# Altium PCB EECS430PhasedArray.PcbDoc (part 1 of 2)
Units mil, origin at the board's own origin, x right, y up, seen from the top; angles counter-clockwise.
Board outline 6900 x 8200 mil, 2 copper layers (Top Layer, Bottom Layer), stack 62.8 mil thick; 97 components, 54 nets, 335 pads, 174 vias.
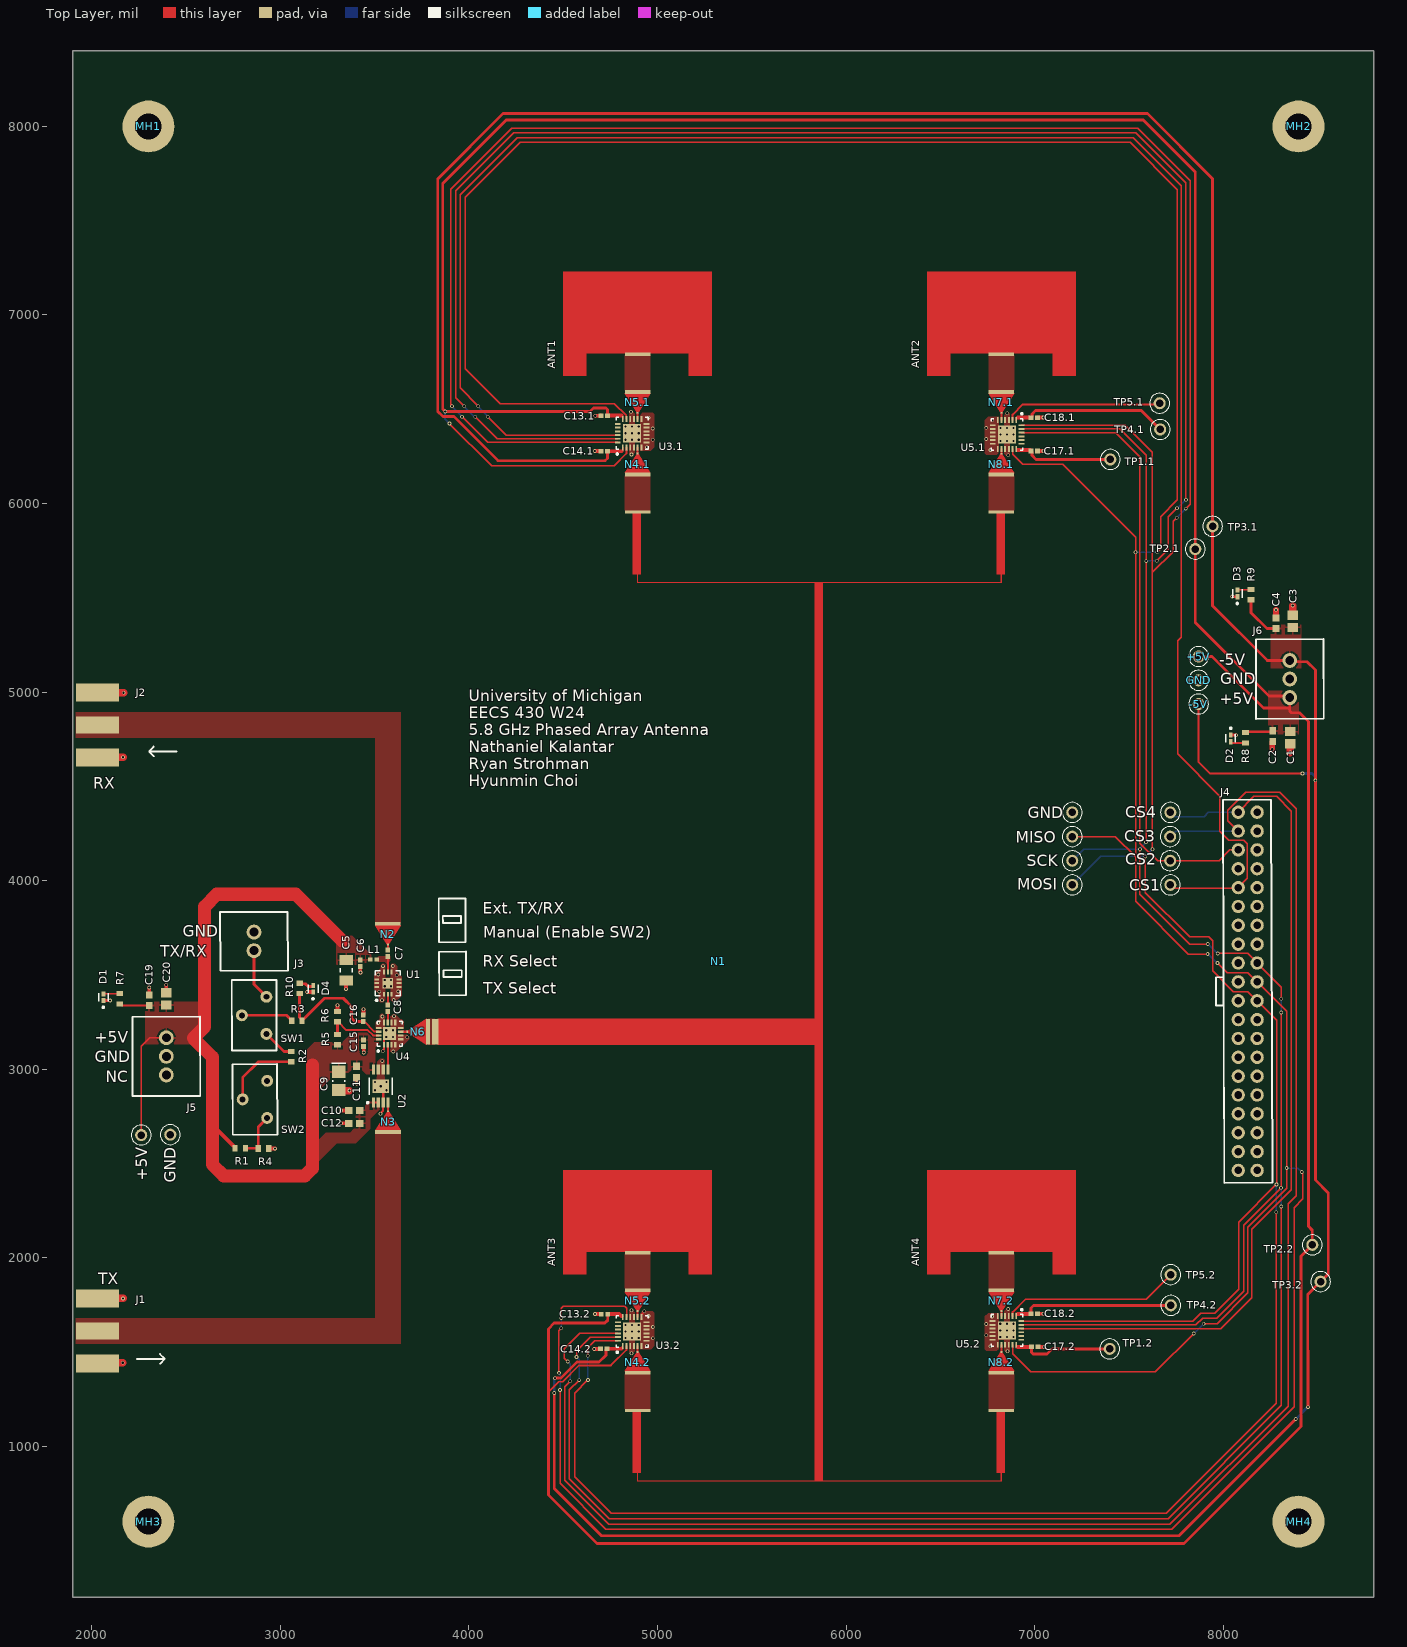
[diagram p0: Top Layer view]
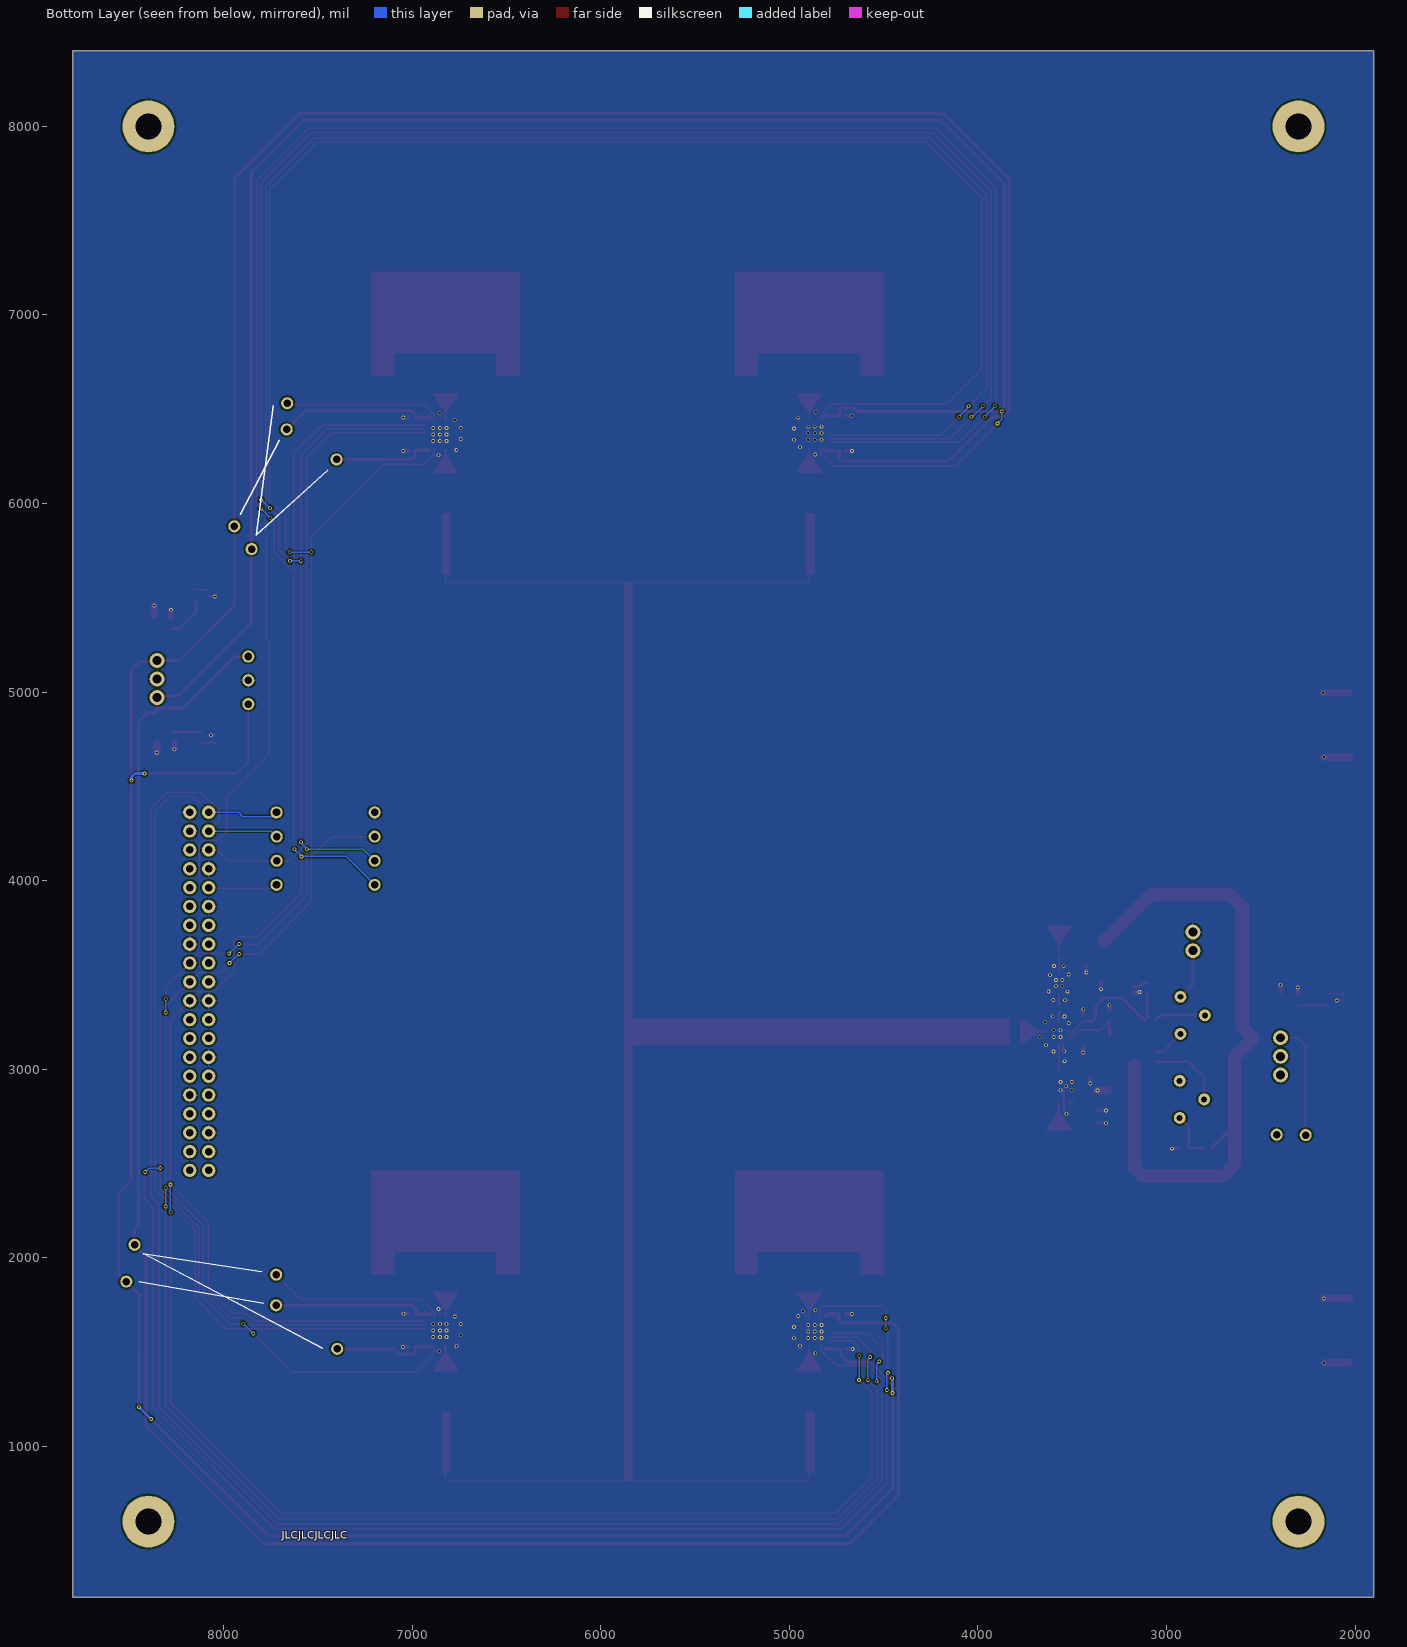
[diagram p1: Bottom Layer view, seen from below]
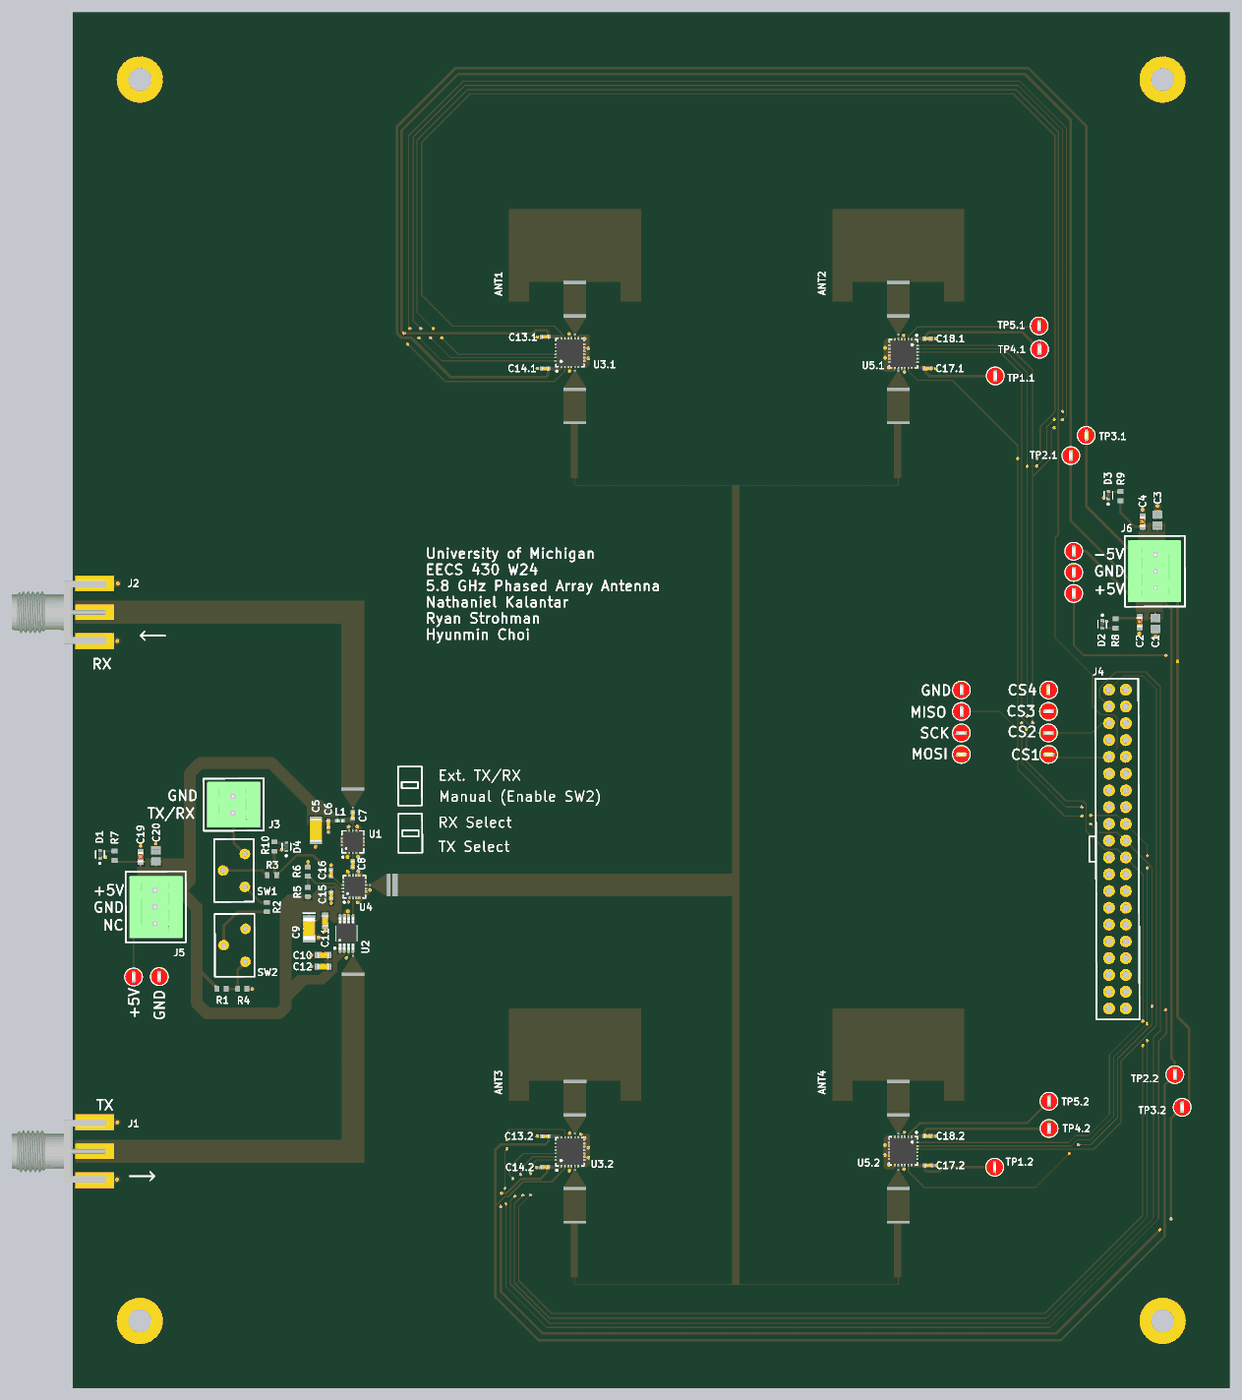
[diagram p3: 3D render of the assembled board from above, using the file's embedded part models]

## Layer stack, top to bottom
Top Solder: solder mask 0.4, Solder Resist, Dk 3.5
Top Layer: signal copper 1.4
Dielectric 1: dielectric 60, FR-4, Dk 4.8
Bottom Layer: signal copper 1.4
Bottom Solder: solder mask 0.4, Solder Resist, Dk 3.5

## Board outline
1900,200 8800,200 8800,8400 1900,8400

## Design rules (kind name [scope] priority, off if disabled: settings)
Clearance [All] p1: gap=10 ignorepadtopadclearanceinfootprint=FALSE except(0: Arc-Hole SMDPad-Hole THPad-Hole Via-Hole Fill-Hole Poly-Hole Region-Hole Text-Hole; 5: Track-Track Track-Poly SMDPad-SMDPad; 7.87: Track-SMDPad Track-THPad; 19.68: THPad-THPad)
HoleSize [All] p1: absolutevalues=TRUE maxlimit=248.03 minlimit=11.81 maxpercent=80.000 minpercent=20.000
MinimumAnnularRing MinimumAnnularRingVia [IsVia] p1: minimumring=3.94
MinimumAnnularRing [All] p2: minimumring=9.84
MinimumSolderMaskSliver [All] p1: minsoldermaskwidth=3.94
PolygonConnect PolygonConnectGNDVia [InNet('GND') And IsPolygon vs InNet('GND') And (IsVia Or IsPad)] p1: thpad.connectstyle=Relief thpad.reliefconductorwidth=10 thpad.reliefentries=4 thpad.polygonreliefangle="90 Angle" thpad.airgapwidth=10 smdpad.connectstyle=Direct smdpad.reliefconductorwidth=10 smdpad.reliefentries=4 smdpad.polygonreliefangle="90 Angle" smdpad.airgapwidth=10 via.connectstyle=Direct via.reliefconductorwidth=10 via.reliefentries=4 via.polygonreliefangle="90 Angle" via.airgapwidth=5
PolygonConnect PolygonConnectPadsDirect [INNet('NetC7_1')] p2: thpad.connectstyle=Relief thpad.reliefconductorwidth=10 thpad.reliefentries=4 thpad.polygonreliefangle="90 Angle" thpad.airgapwidth=10 smdpad.connectstyle=Direct smdpad.reliefconductorwidth=10 smdpad.reliefentries=4 smdpad.polygonreliefangle="90 Angle" smdpad.airgapwidth=10 via.connectstyle=Relief via.reliefconductorwidth=10 via.reliefentries=4 via.polygonreliefangle="90 Angle" via.airgapwidth=10
PolygonConnect PolygonConnectPWR [InNet('5VP') Or InNet('5VN')] p3: thpad.connectstyle=Relief thpad.reliefconductorwidth=10 thpad.reliefentries=4 thpad.polygonreliefangle="90 Angle" thpad.airgapwidth=10 smdpad.connectstyle=Relief smdpad.reliefconductorwidth=10 smdpad.reliefentries=4 smdpad.polygonreliefangle="90 Angle" smdpad.airgapwidth=5 via.connectstyle=Relief via.reliefconductorwidth=10 via.reliefentries=4 via.polygonreliefangle="90 Angle" via.airgapwidth=10
PolygonConnect PolygonConnectNetTie [HasFootprint('50OhmTaper') Or HasFootprint('50OhmMicrostrip5.5mm') Or HasFootprint('ArrayFeed') Or HasFootprint('ArrayPatch') Or HasFootprint('0732511153')] p4: connectstyle=Direct reliefconductorwidth=10 reliefentries=4 polygonreliefangle="90 Angle" airgapwidth=10
PolygonConnect [All] p5: connectstyle=Relief reliefconductorwidth=10 reliefentries=4 polygonreliefangle="90 Angle" airgapwidth=10
RoutingVias [All] p1: holewidth=11.81 width=19.68 viastyle="Through Hole" minholewidth=11.81 minwidth=19.68 maxholewidth=157.48 maxwidth=196.85
SilkToSolderMaskClearance [IsPad] p1: minsilkscreentomaskgap=5 clearancetoexposedcopper=TRUE
SolderMaskExpansion [All] p1: expansion=1.5 istentingtop=FALSE
Width [All] p1: maxlimit=196.85 minlimit=5 preferedwidth=10
27 further rules are at their usual default settings.

## Classes and differential pairs
channel class PhaseShifterB: Phaseshift12 Phaseshift22
channel class PhaseShifterA: Phaseshift11 Phaseshift21
component class "TX/RX Switch": C15 C16 N6 R5 R6 U4
component class Phaseshift22: C17.2 C18.2 N7.2 N8.2 TP1.2 TP2.2 TP3.2 TP4.2 TP5.2 U5.2
component class Phaseshift21: C13.2 C14.2 N4.2 N5.2 U3.2
component class Phaseshift12: C17.1 C18.1 N7.1 N8.1 TP1.1 TP2.1 TP3.1 TP4.1 TP5.1 U5.1
component class Phaseshift11: C13.1 C14.1 N4.1 N5.1 U3.1
component class PA: C9 C10 C11 C12 N3 U2
component class LNA: C5 C6 C7 C8 L1 N2 U1
component class EECS430PhasedArray: ANT1 ANT2 ANT3 ANT4 C1 C2 C3 C4 C19 C20 D1 D2 D3 D4 J1 J2 J3 J4 J5 J6 MH1 MH2 MH3 MH4 N1 R1 R2 R3 R4 R7 R8 R9 R10 SW1 SW2 TP6 TP7 TP8 TP9 TP10 TP11 TP12 TP13 TP14 TP15 TP16 TP17 TP18

## Components (designator, comment, footprint, x,y, rotation, side; value= is the part's Value field where it differs from the comment)
+5V "5000" FP-5000-MFG 2262.08,2650.31 r90 top (schematic designator TP15)
+5V "5000" FP-5000-MFG 7870.08,5188.31 r90 top (schematic designator TP14)
-5V "5000" FP-5000-MFG 7870.08,4936.31 r90 top (schematic designator TP16)
ANT1 "ArrayPatch" ArrayPatch 4894.84,6780.98 r90 top
ANT2 "ArrayPatch" ArrayPatch 6823.98,6780.98 r90 top
ANT3 "ArrayPatch" ArrayPatch 4894.92,2016.69 r90 top
ANT4 "ArrayPatch" ArrayPatch 6824.06,2016.69 r90 top
C1 "Ceramic Capacitor 0805" FP-0805-Capacitor-CL21-IPC_B 8356.65,4757.88 r270 top value=1uF
C2 "Ceramic Capacitor 0603" FP-0603-Capacitor-CL10-IPC_B 8263.15,4765.79 r270 top value=100nF
C3 "Ceramic Capacitor 0805" FP-0805-Capacitor-CL21-IPC_B 8369.33,5374.57 r90 top value=1uF
C4 "Ceramic Capacitor 0603" FP-0603-Capacitor-CL10-IPC_B 8280.23,5364.65 r90 top value=100nF
C5 "CL31A106KBHNNNE" Capactor1206_Samsung 3350.08,3524.31 r270 top value=10uF
C6 "GRM1555C1H101JA01" Capacitor0402_Murata 3424.08,3562.31 r270 top value=100pF
C7 "GRM1555C1H220JA01" Capacitor0402_Murata 3570.08,3614.63 r90 top value=22pF
C8 "GRM1555C1H220JA01" Capacitor0402_Murata 3570.08,3323.31 r90 top value=22pF
C9 "TAJA225K016TNJ" TantCapKyocera1206 3309.2,2937.34 r270 top value=2.2uF
C10 "GRM188R72E331KW07D" Murata0603CeramicCap 3392.08,2780.31 r180 top value=330pF
C11 "GRM188R72E331KW07D" Murata0603CeramicCap 3404.67,2984.58 r270 top value=330pF
C12 "GRM188R72E331KW07D" Murata0603CeramicCap 3392.08,2712.31 r180 top value=330pF
C13.1 "GRM1555C1H101JA01" Capacitor0402_Murata 4717.09,6466.14 r180 top value=100pF (schematic designator C13)
C13.2 "GRM1555C1H101JA01" Capacitor0402_Murata 4719.13,1700.87 r180 top value=100pF (schematic designator C13)
C14.1 "GRM1555C1H101JA01" Capacitor0402_Murata 4717.09,6277.17 r180 top value=100pF (schematic designator C14)
C14.2 "GRM1555C1H101JA01" Capacitor0402_Murata 4715.2,1516.81 r180 top value=100pF (schematic designator C14)
C15 "GRM1555C1H220JA01" Capacitor0402_Murata 3441.09,3137.01 r270 top value=22pF
C16 "GRM1555C1H220JA01" Capacitor0402_Murata 3440.11,3269.89 r90 top value=22pF
C17.1 "GRM1555C1H101JA01" Capacitor0402_Murata 6998.19,6278.15 r0 top value=100pF (schematic designator C17)
C17.2 "GRM1555C1H101JA01" Capacitor0402_Murata 7001.61,1526.65 r0 top value=100pF (schematic designator C17)
C18.1 "GRM1555C1H101JA01" Capacitor0402_Murata 6998.19,6455.31 r0 top value=100pF (schematic designator C18)
C18.2 "GRM1555C1H101JA01" Capacitor0402_Murata 6998.27,1701.85 r0 top value=100pF (schematic designator C18)
C19 "Ceramic Capacitor 0805" FP-0805-Capacitor-CL21-IPC_B 2395.04,3372.09 r90 top value=1uF
C20 "Ceramic Capacitor 0603" FP-0603-Capacitor-CL10-IPC_B 2304.49,3365.2 r90 top value=100nF
CS1 "5000" FP-5000-MFG 7720.48,3977.08 r0 top (schematic designator TP7)
CS2 "5000" FP-5000-MFG 7719.51,4105.14 r0 top (schematic designator TP9)
CS3 "5000" FP-5000-MFG 7719.51,4233.2 r0 top (schematic designator TP11)
CS4 "5000" FP-5000-MFG 7720.51,4361.26 r90 top (schematic designator TP13)
D1 "APG1005CGC-T" FP-APG1005CGC-T-MFG 2062.36,3380.94 r90 top
D2 "APG1005CGC-T" FP-APG1005CGC-T-MFG 8040.08,4754.31 r270 top
D3 "APG1005CGC-T" FP-APG1005CGC-T-MFG 8076.14,5522.68 r90 top
D4 "APG1005CGC-T" FP-APG1005CGC-T-MFG 3174,3426 r90 top
GND "5000" FP-5000-MFG 7870.08,5062.31 r90 top (schematic designator TP18)
GND "5000" FP-5000-MFG 2416.08,2652.31 r90 top (schematic designator TP17)
GND "5000" FP-5000-MFG 7200,4361.26 r90 top (schematic designator TP12)
J1 "0732511153" 0732511153 2030.08,1610.81 r0 top
J2 "0732511153" 0732511153 2030.08,4824.53 r0 top
J3 "1881558" 1881558 2860.08,3677.52 r90 top
J4 "Adafruit_1993" Aadafruit_1993 8130.47,3412.64 r90 top
J5 "1881561" 1881561 2395.08,3067.73 r270 top
J6 "1881561" 1881561 8353.7,5068.94 r90 top
L1 "LQG15HS10NJ02D" FP-LQG15HH_02-IPC_B 3493.21,3581.31 r180 top
MH1 "4-40 Mounting Hole" "4-40 Mounting Hole" 2300,8000 r0 top
MH2 "4-40 Mounting Hole" "4-40 Mounting Hole" 8400,8000 r0 top
MH3 "4-40 Mounting Hole" "4-40 Mounting Hole" 2300,600 r0 top
MH4 "4-40 Mounting Hole" "4-40 Mounting Hole" 8400,600 r0 top
MISO "5000" FP-5000-MFG 7200,4233.2 r90 top (schematic designator TP10)
MOSI "5000" FP-5000-MFG 7200,3977.08 r0 top (schematic designator TP8)
N1 "ArrayFeed" ArrayFeed 4675.79,3199.76 r90 top net-tie
N2 "50OhmTaper" 50OhmTaper 3570.08,3770.54 r180 top net-tie
N3 "50OhmTaper" 50OhmTaper 3571.08,2666.07 r0 top net-tie
N4.1 "50OhmTaper" 50OhmTaper 4894.72,6153.86 r0 top net-tie (schematic designator N4)
N4.2 "50OhmTaper" 50OhmTaper 4894.79,1389.55 r0 top net-tie (schematic designator N4)
N5.1 "50OhmTaper" 50OhmTaper 4894.72,6591.14 r180 top net-tie (schematic designator N5)
N5.2 "50OhmTaper" 50OhmTaper 4894.79,1826.85 r180 top net-tie (schematic designator N5)
N6 "50OhmTaper" 50OhmTaper 3783.2,3198.03 r90 top net-tie
N7.1 "50OhmTaper" 50OhmTaper 6823.86,6591.14 r180 top net-tie (schematic designator N7)
N7.2 "50OhmTaper" 50OhmTaper 6823.94,1826.85 r180 top net-tie (schematic designator N7)
N8.1 "50OhmTaper" 50OhmTaper 6823.87,6153.56 r0 top net-tie (schematic designator N8)
N8.2 "50OhmTaper" 50OhmTaper 6823.92,1389.57 r0 top net-tie (schematic designator N8)
R1 "RC0603FR-072K2L" RESC1608X55X25NL10T15 2787.52,2580.31 r180 top value=10k
R2 "RC0603FR-072K2L" RESC1608X55X25NL10T15 3057.08,3066.31 r270 top value=0
R3 "RC0603FR-072K2L" RESC1608X55X25NL10T15 3088,3257 r180 top value=0
R4 "RC0603FR-072K2L" RESC1608X55X25NL10T15 2910.52,2579.31 r180 top value=22k
R5 "RC0603FR-072K2L" RESC1608X55X25NL10T15 3302.89,3156.69 r270 top value=10k
R6 "RC0603FR-072K2L" RESC1608X55X25NL10T15 3302.89,3278.73 r270 top value=22k
R7 "RC0603FR-072K2L" RESC1608X55X25NL10T15 2148.98,3373.07 r270 top value=R
R8 "RC0603FR-072K2L" RESC1608X55X25NL10T15 8119.08,4757.31 r90 top value=R
R9 "RC0603FR-072K2L" RESC1608X55X25NL10T15 8147.99,5516.77 r90 top value=R
R10 "RC0603FR-072K2L" RESC1608X55X25NL10T15 3102,3428 r270 top value=R
SCK "5000" FP-5000-MFG 7200,4105.14 r0 top (schematic designator TP6)
SW1 "CL-SB-12C-01" CL-SB-12C-01 2861.08,3285.31 r90 top
SW2 "CL-SB-12C-01" CL-SB-12C-01 2865.08,2839.31 r90 top
TP1.1 "5000" FP-5000-MFG 7401.9,6233.46 r90 top (schematic designator TP1)
TP1.2 "5000" FP-5000-MFG 7398.58,1516.18 r90 top (schematic designator TP1)
TP2.1 "5000" FP-5000-MFG 7852.68,5758.27 r90 top (schematic designator TP2)
TP2.2 "5000" FP-5000-MFG 8473.19,2067.99 r90 top (schematic designator TP2)
TP3.1 "5000" FP-5000-MFG 7944.25,5878.98 r90 top (schematic designator TP3)
TP3.2 "5000" FP-5000-MFG 8516.85,1873.07 r90 top (schematic designator TP3)
TP4.1 "5000" FP-5000-MFG 7666.38,6392.48 r90 top (schematic designator TP4)
TP4.2 "5000" FP-5000-MFG 7722.72,1747.13 r90 top (schematic designator TP4)
TP5.1 "5000" FP-5000-MFG 7663.66,6531.57 r90 top (schematic designator TP5)
TP5.2 "5000" FP-5000-MFG 7722.24,1909.76 r90 top (schematic designator TP5)
U1 "PMA3-63GLN+" PMA3-63GLN+-QFN127P600-8N 3570.03,3455.91 r90 top
U2 "HMC407MS8GETR" HMC407MS8GETR 3532.59,2909.62 r90 top
U3.1 "MAPS-010145-TR0500" MAPS-010145-TR0500_QFN50P400X400X100_HS-25N 4865.31,6372.64 r90 top (schematic designator U3)
U3.2 "MAPS-010145-TR0500" MAPS-010145-TR0500_QFN50P400X400X100_HS-25N 4865.39,1608.35 r90 top (schematic designator U3)
U4 "PE42423B-Z" PE42423-QFN127P600-8N 3579.87,3188.2 r90 top
U5.1 "MAPS-010145-TR0500" MAPS-010145-TR0500_QFN50P400X400X100_HS-25N 6854.04,6365.81 r270 top (schematic designator U5)
U5.2 "MAPS-010145-TR0500" MAPS-010145-TR0500_QFN50P400X400X100_HS-25N 6853.7,1613.89 r270 top (schematic designator U5)

## Footprints (in the part's own frame and the unit in brackets; to place one, negate y for a bottom-side part, rotate by r counter-clockwise, add the part's x,y. Pads: shape width x height; smd on the part's side, far side on the other; paste and mask are expansions set on the pad)
"4-40 Mounting Hole" [mm]
  round 7 hole 3.5: 1(0,0)
50OhmTaper [mil] "Triangular taper between 50 Ohms and 0402 width"
  rect 11x10 smd paste+0 mask-393.7: 1(0,110.24)
  rect 136.1x19.68 smd paste+0 mask-393.7: 2(0,0)
  Top Layer region: -68.03,7.87 68.03,7.87 68.03,9.84 5.47,108.27 -5.47,108.27 -68.03,9.84
1881558 [mm] "2 Position Terminal Block Header, Male Pins, Shrouded (4 Side) 0.098\" (2.50mm) Vertical Through Hole"
  round 2 hole 1.2: 1(-1.25,0) 2(1.25,0)
  silkscreen extent -3.97,-4.56 3.97,4.56, body extent -3.44,-4.05 3.46,4.05, height 10.11
1881561 [mm] "3 Position Terminal Block Header, Male Pins, Shrouded (4 Side) 0.098\" (2.50mm) Vertical Through Hole"
  round 2 hole 1.2: 1(-2.5,0) 2(0,0) 3(2.5,0)
  silkscreen extent -5.37,-4.57 5.37,4.57, body extent -4.7,-4 4.7,4.1, height 10.11
0732511153 [mil] "SMA Connector Jack, Female Socket 50 Ohms Board Edge, End Launch Solder"
  rect 230x90 smd paste-99999: 1(0,0)
  rect 230x95 smd paste-99999: 2(0,172.5) 3(0,-172.5)
  body extent -494,-188 68,188, height 172
Aadafruit_1993 [mm] "2x20 0.1in pitch shrouded header"
  round 1.8 hole 1.02: 1(-24.13,-1.27) 2(-24.13,1.27) 3(-21.59,-1.27) 4(-21.59,1.27) 5(-19.05,-1.27) 6(-19.05,1.27) 7(-16.51,-1.27) 8(-16.51,1.27) 9(-13.97,-1.27) 10(-13.97,1.27) 11(-11.43,-1.27) 12(-11.43,1.27) 13(-8.89,-1.27) 14(-8.89,1.27) 15(-6.35,-1.27) 16(-6.35,1.27) 17(-3.81,-1.27) 18(-3.81,1.27) 19(-1.27,-1.27) 20(-1.27,1.27) 21(1.27,-1.27) 22(1.27,1.27) 23(3.81,-1.27) 24(3.81,1.27) 25(6.35,-1.27) 26(6.35,1.27) 27(8.89,-1.27) 28(8.89,1.27) 29(11.43,-1.27) 30(11.43,1.27) 31(13.97,-1.27) 32(13.97,1.27) 33(16.51,-1.27) 34(16.51,1.27) 35(19.05,-1.27) 36(19.05,1.27) 37(21.59,-1.27) 38(21.59,1.27) 39(24.13,-1.27) 40(24.13,1.27)
  silkscreen extent -25.81,-3.34 25.81,4.27
ArrayFeed [mm]
  rect 3.457x0.836 smd paste+0 mask-10: 1(-0.034,21.709)
  rect 0.4x3.457 smd paste+0 mask-10: 2(69.967,-5.562) 3(69.967,-54.562) 4(-51.063,-5.562) 5(-51.063,-54.562)
  Top Layer region: -1.763,21.391 1.694,21.391 1.694,-29.412 60.428,-29.412 60.428,-5.509 61.597,-5.509 61.597,-4.912 69.817,-4.912 69.817,-6.001 61.597,-6.001 61.597,-5.614 60.533,-5.614 60.533,-54.509 61.597,-54.509 61.597,-53.912 69.817,-53.912 69.817,-55.001 61.597,-55.001 61.597,-54.614 60.428,-54.614 60.428,-30.501 -60.497,-30.501 -60.497,-54.509 -59.433,-54.509 -59.433,-53.912 -51.213,-53.912 -51.213,-55.001 -59.433,-55.001 -59.433,-54.614 -60.602,-54.614 -60.602,-5.509 -59.433,-5.509 -59.433,-4.912 -51.213,-4.912 -51.213,-6.001 -59.433,-6.001 -59.433,-5.614 -60.497,-5.614 -60.497,-29.412 -1.763,-29.412
ArrayPatch [mil]
  rect 19.92x136.1 smd paste+0 mask-393.7: 1(9.96,0)
  Top Layer region: 446.99,393.7 446.99,-393.7 -104.19,-393.7 -104.19,-272.24 14.47,-272.24 14.47,-68.06 14.47,68.06 14.47,272.24 -104.19,272.24 -104.19,393.7
Capacitor0402_Murata [mm] "0402 Murata Ceramic Capacitor"
  rect 0.66x0.62 smd: 1(-0.44,0) 2(0.44,0)
  body extent -0.53,-0.28 0.53,0.28, height 0.55
Capactor1206_Samsung [mm] "1206 Ceramic Capacitor Samsung"
  rect 1.35x1.8 smd: 1(-1.375,0) 2(1.375,0)
  silkscreen extent -0.3,-0.8 0.3,0.8, body extent -1.7,-0.9 1.7,0.9, height 1.8
CL-SB-12C-01 [mm] "Slide Switch SPDT Through Hole"
  round 1.6 hole 0.8: 1(-2.5,-1.65) 2(2.5,-1.65) 3(0,1.65)
  silkscreen extent -4.76,-3.02 4.76,3.02
FP-0603-Capacitor-CL10-IPC_B [mil]
  rect 37.72x35.91 smd: 1(-28.62,0) 2(28.62,0)
  body extent -57,-28 57,28, height 10
FP-0805-Capacitor-CL21-IPC_B [mil]
  rect 49.4x57.33 smd: 1(-32.51,0) 2(32.51,0)
  body extent -67,-39 67,39, height 10
FP-5000-MFG [mil]
  round 64 hole 40: 1(0,0)
  silkscreen extent -53,-53 53,53, body extent -50,-50 50,50, height 180
FP-APG1005CGC-T-MFG [mm]
  rect 0.7x0.5 smd: 1(-0.45,0) 2(0.45,0)
  silkscreen extent -1.47,-0.65 0.55,0.65, body extent -0.9,-0.4 0.9,0.4, height 0.25
FP-LQG15HH_02-IPC_B [mil]
  rect 24.23x22.54 smd paste+0 mask+0: 1(-16.87,0) 2(16.87,0)
  body extent -35,-17 35,17, height 10
HMC407MS8GETR [mm] "TSOP, 8-Leads, Body 3.00x3.00mm, Pitch 0.65mm, Thermal Pad 2.26x1.83mm, IPC Medium Density"
  rect 1.35x0.45 smd: 1(-2.225,0.975) 2(-2.225,0.325) 3(-2.225,-0.325) 4(-2.225,-0.975) 5(2.225,-0.975) 6(2.225,-0.325) 7(2.225,0.325) 8(2.225,0.975)
  rect 1.83x2.26 smd: 9(0,0)
  silkscreen extent -2.35,-1.55 1.15,1.9, body extent -2.45,-1.55 2.45,1.55, height 1.1
MAPS-010145-TR0500_QFN50P400X400X100_HS-25N [mm] "QFN, 24-Leads, Body 4.00x4.00mm, Pitch 0.50mm, Thermal Pad 2.45x2.45mm, IPC Medium Density"
  rect 0.8x0.25 smd: 1(-1.925,1.25) 2(-1.925,0.75) 3(-1.925,0.25) 4(-1.925,-0.25) 5(-1.925,-0.75) 6(-1.925,-1.25) 13(1.925,-1.25) 14(1.925,-0.75) 15(1.925,-0.25) 16(1.925,0.25) 17(1.925,0.75) 18(1.925,1.25)
  rect 0.25x0.8 smd: 7(-1.25,-1.925) 8(-0.75,-1.925) 9(-0.25,-1.925) 10(0.25,-1.925) 11(0.75,-1.925) 12(1.25,-1.925) 19(1.25,1.925) 20(0.75,1.925) 21(0.25,1.925) 22(-0.25,1.925) 23(-0.75,1.925) 24(-1.25,1.925)
  rect 2.45x2.45 smd: 25(0,0)
  silkscreen extent -2.92,-2.15 2.15,2.15, body extent -2.05,-2.05 2.05,2.05, height 1
Murata0603CeramicCap [mm] "Murata 0603 Ceramic Capacitor Footprint"
  rect 1x0.95 smd: 1(-0.75,0) 2(0.75,0)
  body extent -0.85,-0.45 0.85,0.45, height 0.9
PE42423-QFN127P600-8N [mm]
  rect 0.75x0.3 smd: 1(-1.5,0.75) 2(-1.5,0.25) 3(-1.5,-0.25) 4(-1.5,-0.75) 9(1.5,-0.75) 10(1.5,-0.25) 11(1.5,0.25) 12(1.5,0.75)
  rect 0.3x0.75 smd: 5(-0.75,-1.5) 6(-0.25,-1.5) 7(0.25,-1.5) 8(0.75,-1.5) 13(0.75,1.5) 14(0.25,1.5) 15(-0.25,1.5) 16(-0.75,1.5)
  rect 1.75x1.75 smd: 17(0,0)
  silkscreen extent -2.47,-1.7 1.7,1.7, body extent -1.6,-1.6 1.6,1.6, height 0.9
PMA3-63GLN+-QFN127P600-8N [mm]
  rect 0.65x0.25 smd: 1(-1.5,0.51) 2(-1.5,0) 3(-1.5,-0.51) 7(1.5,-0.51) 8(1.5,0) 9(1.5,0.51)
  rect 0.25x0.65 smd: 4(-0.51,-1.5) 5(0,-1.5) 6(0.51,-1.5) 10(0.51,1.5) 11(0,1.5) 12(-0.51,1.5)
  rect 1.45x1.45 smd: 13(0,0)
  silkscreen extent -2.44,-1.67 1.67,1.67, body extent -1.52,-1.52 1.52,1.52, height 0.89
RESC1608X55X25NL10T15 [mm] "Chip Resistor, 2-Leads, Body 1.70x0.90mm, IPC Medium Density"
  rect 0.7x0.9 smd: 1(-0.7,0) 2(0.7,0)
  body extent -0.85,-0.45 0.85,0.45, height 0.55
TantCapKyocera1206 [mm] "1206 Tantalum Capacitor Kyocera"
  rect 1.65x1.85 smd: 1(-1.225,0) 2(1.225,0)
  silkscreen extent -2.37,-0.92 0.1,0.92, body extent -1.7,-0.9 1.7,0.9, height 1.8

## Part data
+5V +5V -5V CS1 CS2 CS3 CS4 GND GND GND MISO MOSI SCK TP1.1 TP1.2 TP2.1 TP2.2 TP3.1 TP3.2 TP4.1 TP4.2 TP5.1 TP5.2: "Red PC Test Point, Miniature Phosphor Bronze Silver Plating Through Hole Mounting Type", Supplier Part Number 1=8000564, Connector Type="Interconnection Device", Contact Finish - Termination="Silver (Ag)", JESD-609 Code=e4, Mounting Technology=THT, Pins=1, Reach SVHC Compliant=Yes, RoHS Compliant=Yes, Supplier 1="Future Electronics"
ANT1 ANT2 ANT3 ANT4: "Copper footprint for patch antenna element"
C1 C3 C19: "CAP CER 50V X7R 0805", Manufacturer=KEMET, Manufacturer Part Number=C0603C104K5RACTU, Package=0805, Supplier Part Number 1=CL21B105KBFNNNG, Temperature="-55°C to +125°C", Temperature Characteristic=X7R, Temperature Coefficient=30ppm/°C, Temperature Range High=+125°C, Temperature Range Low=-55°C, Tolerance=0.1, Voltage Rating="50 V", Automotive=Yes, Automotive Grade="Grade 1", Category=Cap, ComponentLink2Description=Datasheet, ComponentLink2URL=https://api.kemet.com/component-edge/download/datasheet/C0603C100J5GACAUTO.pdf, Device Class L1="Passive Components", Device Class L2=Capacitors, Device Class L3="Ceramic Capacitors", Digikey Description="CAP CER 0.1UF 50V X7R 0603", Height=0.87mm, Lead Free=Yes, Material=Ceramic, Octopart=https://octopart.com/c0603c104k5ractu-kemet-139244, RoHS=TRUE, Supplier 1="Arrow Electronics"
C2 C4 C20: "CAP CER 50V X7R 0603", Manufacturer=KEMET, Manufacturer Part Number=C0603C104K5RACTU, Package=C0603C-CF, Supplier Part Number 1=CL10B104KB8NNNC, Temperature="-55°C to +125°C", Temperature Characteristic=X7R, Temperature Coefficient=30ppm/°C, Temperature Range High=+125°C, Temperature Range Low=-55°C, Tolerance=0.1, Voltage Rating="50 V", Automotive=Yes, Automotive Grade="Grade 1", Category=Cap, ComponentLink2Description=Datasheet, ComponentLink2URL=https://api.kemet.com/component-edge/download/datasheet/C0603C100J5GACAUTO.pdf, Device Class L1="Passive Components", Device Class L2=Capacitors, Device Class L3="Ceramic Capacitors", Digikey Description="CAP CER 0.1UF 50V X7R 0603", Height=0.87mm, Lead Free=Yes, Material=Ceramic, Octopart=https://octopart.com/c0603c104k5ractu-kemet-139244, RoHS=TRUE, Supplier 1="Arrow Electronics"
C5: "10 µF ±10% 50V Ceramic Capacitor X5R 1206 (3216 Metric)", Package=1206, Temperature Characteristic=X5R, Temperature Range High=+125°C, Temperature Range Low=-55°C, Tolerance=10%, Voltage Rating="50 V", Automotive=Yes, Automotive Grade="Grade 1", Category=Cap, ComponentLink2Description=Datasheet, ComponentLink2URL=https://api.kemet.com/component-edge/download/datasheet/C0603C100J5GACAUTO.pdf, Device Class L1="Passive Components", Device Class L2=Capacitors, Device Class L3="Ceramic Capacitors", Lead Free=Yes, Material=Ceramic, RoHS=TRUE, Supplier 1="Arrow Electronics", Supplier Part Number 1=CL31A106KBHNNNE
C6 C13.1 C13.2 C14.1 C14.2 C17.1 C17.2 C18.1 C18.2: "100 pF ±5% 50V Ceramic Capacitor C0G, NP0 0402 (1005 Metric)", Package=0402, Supplier Part Number 1=GRM1555C1H101JA01D, Temperature Characteristic=X7R, Temperature Range High=+125°C, Temperature Range Low=-55°C, Tolerance=5%, Voltage Rating="50 V", Automotive=Yes, Automotive Grade="Grade 1", Category=Cap, ComponentLink2Description=Datasheet, ComponentLink2URL=https://api.kemet.com/component-edge/download/datasheet/C0603C100J5GACAUTO.pdf, Device Class L1="Passive Components", Device Class L2=Capacitors, Device Class L3="Ceramic Capacitors", Lead Free=Yes, Material=Ceramic, RoHS=TRUE, Supplier 1=Avnet
C7 C8 C15 C16: "22 pF ±5% 50V Ceramic Capacitor C0G, NP0 0402 (1005 Metric)", Package=0402, Supplier Part Number 1=GRM1555C1H220JA01D, Temperature Characteristic=X7R, Temperature Range High=+125°C, Temperature Range Low=-55°C, Tolerance=5%, Voltage Rating="50 V", Automotive=Yes, Automotive Grade="Grade 1", Category=Cap, ComponentLink2Description=Datasheet, ComponentLink2URL=https://api.kemet.com/component-edge/download/datasheet/C0603C100J5GACAUTO.pdf, Device Class L1="Passive Components", Device Class L2=Capacitors, Device Class L3="Ceramic Capacitors", Lead Free=Yes, Material=Ceramic, RoHS=TRUE, Supplier 1=Avnet
C9: "2.2 µF Molded Tantalum Capacitors 16 V 1206 (3216 Metric) 6.5Ohm @ 100kHz", Capacitor Type=Tantalum, Manufacturer="Kyocera AVX", Manufacturer Part Number=TPSB226K020T0400, Package=1206, Supplier Part Number=9110023, Supplier Part Number 1=67AK1283, Tolerance=10%, Category="Tantalum Capacitors", ComponentLink1Description=https://datasheet.ciiva.com:443/pdfs/VipMasterIC/IC/AVXC/AVXC-S-A0008672189/AVXC-S-A0008672189-1.pdf?src-supplier=IHS+Markit, ComponentLink1URL=https://datasheet.ciiva.com:443/pdfs/VipMasterIC/IC/AVXC/AVXC-S-A0008672189/AVXC-S-A0008672189-1.pdf?src-supplier=IHS+Markit, Dielectric Material=Tantalum, Pins=2, Pricing="2000=0.3, 4000=0.29, 6000=0.29, 8000=0.285, 10000=0.28 (USD)", Reach SVHC Compliant=Yes, RoHS=Yes, RoHS Compliant=Yes, Stock=2000, Supplier="Future Electronics", Supplier 1=Newark
C10 C11 C12: "330 pF ±10% 250V Ceramic Capacitor X7R 0603 (1608 Metric)", Package=0603, Supplier Part Number 1=GRM1555C1H101JA01D, Temperature Characteristic=X7R, Temperature Range High=+125°C, Temperature Range Low=-55°C, Tolerance=5%, Voltage Rating="250 V", Automotive=Yes, Automotive Grade="Grade 1", Category=Cap, ComponentLink2Description=Datasheet, ComponentLink2URL=https://api.kemet.com/component-edge/download/datasheet/C0603C100J5GACAUTO.pdf, Device Class L1="Passive Components", Device Class L2=Capacitors, Device Class L3="Ceramic Capacitors", Lead Free=Yes, Material=Ceramic, RoHS=TRUE, Supplier 1=Avnet
D1 D2 D3 D4: "LED GREEN CLEAR CHIP SMD", Case Code (Imperial)=0402, Case Code (Metric)=1005, Color=Green, Forward Voltage=2V, Lens Color=Colorless, Package Quantity=1, Supplier Part Number 1=754-1811-1-ND, Test Current=20mA, Case/Package=0402, Dominant Wavelength=571nm, Height=0.25mm, Lead Free="Lead Free", Length=1mm, Lens Transparency=Clear, Luminous Intensity=35mcd, Mount="Surface Mount", Packaging="Tape and Reel", Supplier 1=Digi-Key, Viewing Angle=120°, Width=0.5mm
J1 J2: "SMA Connector Jack, Female Socket 50 Ohms Board Edge, End Launch Solder"
J3: "2 Position Terminal Block Header, Male Pins, Shrouded (4 Side) 0.098\" (2.50mm) Vertical Through Hole", Supplier Part Number 1=651-1881558, Supplier 1=Mouser
J4: "2x20 pin Male IDC Box Header - Raspberry Pi A+/B+/Pi 2/Pi 3/Pi 4"
J5 J6: "3 Position Terminal Block Header, Male Pins, Shrouded (4 Side) 0.098\" (2.50mm) Vertical Through Hole", Supplier Part Number 1=651-1881561, Supplier 1=Mouser
L1: "Multilayer type RF Inductor 10nH ±5% 0.26Ω 500mA 0402", Case Code (Imperial)=0402, Case Code (Metric)=1005, Current Rating=300mA, DC Resistance (DCR)=260mR, Inductance=10nH, Max Operating Temperature=125°C, Min Operating Temperature=-55°C, Package Quantity=10000, Self Resonant Frequency=3.4GHz, Test Frequency=100MHz, Tolerance=5%, Case/Package=0402, Core Material=Air, DC Current=300mA, Depth=0.55mm, Height=0.5mm, Height - Seated (Max)=0.022inch, Lead Free="Lead Free", Length=0.039inch, Max DC Current=300mA, Military Standard=Not, Mount="Surface Mount", Packaging="Tape and Reel", Q Factor=8, Radiation Hardening=No, Shielding=Unshielded, Supplier 1="Arrow Electronics", Supplier Part Number 1=LQG15HS10NJ02D, Termination=SMD/SMT, Width=0.5mm
N1: "Copper net tie for 1:4 splitter/combiner"
N2 N3 N4.1 N4.2 N5.1 N5.2 N6 N7.1 N7.2 N8.1 N8.2: "Triangular taper from 50 Ohms to 0402 width"
R1 R2 R3 R4 R5 R6 R7 R8 R9 R10: library part "Resistor 0603", "Thick Film Resistor, 2.2 KOhm, 100 mW, 50 V, +/- 1%, -55 to 155 degC, 2-Pin SMD (0603), RoHS, Tape and Reel", Case Code - in=0603, Case Code - mm=1608, Manufacturer=Yageo, Operating Temperature Range=-55Cto+155C, Package Description="2-Pin Surface Mount Device, Body 1.6 x 0.8 mm", Power Rating=100mW, Temperature Coefficient=100PPM/C, Tolerance=1%, Voltage Rating=50V, Datasheet URL=http://www.yageo.com/documents/recent/PYu-RC_Group_51_RoHS_L_7.pdf, Datasheet Version="Rev. 7, 05/2017", Manufacturer URL=http://www.yageo.com/, Mounting Technology=SurfaceMount, Package Reference=0603, Packaging=Reel, Product=ThickFilmResistorsGeneralPurpose, Series=RC, Termination Style=SMD/SMT
SW1 SW2: "Slide Switch SPDT Through Hole", Supplier Part Number 1=97AH8227, Supplier 1=Newark
U1: "RF Amplifier IC LTE, Radar, SATCOM, UMTS, WiFi, WiMAX, WLAN 1.8GHz ~ 6GHz 12-MCLP (3x3)", Supplier Part Number 1=3157-PMA3-63GLN+CT-ND, Supplier 1=Digikey
U2: "RF Amplifier IC General Purpose 5GHz ~ 7GHz 8-MSOP-EP", Supplier Part Number 1=584-HMC407MS8GETR, Supplier 1=Mouser
U3.1 U3.2 U5.1 U5.2: "Phase Detectors / Shifters 3.5-6.0GHz 4-Bit Step 22.5 deg.", Supplier Part Number 1=937-MAPS-010145-T5, Supplier 1=Mouser
U4: "RF Switch IC 802.11a/b/g/n/ac SPDT 6 GHz 50Ohm 16-QFN (3x3)", Supplier Part Number 1=1046-1103-1-ND, Supplier 1=Digikey

## Via types
v1: diameter 19.68, hole 11.81, Top Layer to Bottom Layer, 174 vias

## Nets (pads, with @x,y where several pads share a name; then routed paths per layer and width w, separated by ;. In a path a pad name is that pad's centre, name@x,y a point inside that pad or via, vN(x,y) a via of type N, cw(c..) or ccw(c..) an arc to the next point about the centre after c; other vN are vias at no path point)
5V: +5V.1@2262.08,2650.31 C5.1 C6.1 C9.1 C10.1 C11.1 C12.1 C15.1 C19.1 C20.1 J5.1 L1.2 R1.2 R5.2 R7.2 U2.1 U2.2 U2.8 U4.16 | length 4385
  Top Layer w10: R7.2@2148.98,3345.51 2152.91,3345.51 2161.85,3336.58 C20.1@2304.49,3336.58 ; +5V.1@2259.08,2650.31 2262.08,2653.31 2262.08,3121.31 2307.08,3166.31 2394.93,3166.31 J5.1@2395.08,3166.16 ; U2.1@3494.2,2822.02 U2.2@3519.79,2822.02
  Top Layer w20: 2648.08,2696.13 2759.96,2584.24 R1.2@2759.96,2580.31
  Top Layer w70: 3170.08,3022.3 3170.08,2474.31 3129.07,2433.31 2700.08,2433.31 2640.08,2493.31 2640.08,3063.31 2538.9,3164.49 2598.08,3223.66 2598.08,3862.31 2663.08,3927.31 3082.08,3927.31 3328.08,3681.31
5VN_PS: -5V.1 C3.1 C4.1 C14.1.1 C14.2.1 J6.3 R9.1 TP3.1.1 TP3.2.1 U3.1.1 U3.2.1 | length 20328.6
  Top Layer w10: U3.1.1@4816.1,6296.85 4816.18,6296.77 4816.18,6278.07 ; -5V.1@7870.08,4936.31 7870.08,4628.31 7930.39,4568 v1(8421,4568)
  Top Layer w15: v1(4452.84,1282.71) 4452.96,1282.59 4452.96,774.76 4702.8,524.92 7766.42,524.92 v1(8385.43,1143.94) ; v1(4455.94,1360.32) 4456.55,1360.92 4488.29,1360.92 4573.62,1446.26 4690.79,1446.26 4727.03,1482.49 4727.03,1512.11 4731.73,1516.81 C14.2.1@4732.52,1516.81 ; C14.1.1@4734.41,6277.17 4734.41,6238.78 4722.65,6227.02 4154.63,6227.02 3921.2,6460.45 3862.85,6460.45 3834.8,6488.5 3834.8,7721.06 4181.34,8067.6 7599.06,8067.6 7944.25,7722.4 TP3.1.1@7944.25,5878.98 7944.25,5457.72 8234.61,5167.36 J6.3@8353.7,5167.36 8360.45,5160.61 8445.1,5160.61 8489.53,5116.18 v1(8489.53,4531.31) 8489.53,2411.46 8557.4,2343.58 8557.4,1913.62 TP3.2.1@8516.85,1873.07 8448.74,1804.96 8448.74,1507.29 8449.8,1506.22 v1(8449.8,1207.28) ; R9.1@8147.99,5489.21 8147.99,5420.39 8232.36,5336.02 C4.1@8280.23,5336.02
  Top Layer w20: C14.2.1@4732.52,1516.81 4808.31,1516.81 4810.28,1518.78 ; C14.1.1@4734.41,6277.17 4809.06,6277.17
  Bottom Layer w15: v1(4452.84,1282.71) 4452.84,1355.94 4455.94,1359.05 v1(4455.94,1360.32) ; v1(8385.43,1143.94) 8385.94,1143.94 8449.29,1207.28 v1(8449.8,1207.28) ; v1(8421,4568) 8471.22,4568 8489.53,4549.7 v1(8489.53,4531.31)
5VP_PS: +5V.1@7870.08,5188.31 C1.1 C2.1 C13.1.1 C13.2.1 J6.1 R8.2 TP2.1.1 TP2.2.1 U3.1.2 U3.1.18 U3.2.2 U3.2.18 | length 21598
  Top Layer w10: v1(3896.81,6423.82) 4120.61,6200.02 4770.46,6200.02 4835.79,6265.35 U3.1.2@4835.79,6296.85 ; 4421.5,1286.5 4476.61,1341.61 4497.28,1341.61 4583.9,1428.23 4753.19,1428.23 4835.79,1510.83 4835.79,1532.48 U3.2.2@4835.87,1532.56 ; 4815.09,6467.1 4816.02,6466.17 4816.02,6448.5 U3.1.18@4816.1,6448.43
  Top Layer w15: C13.1.1@4734.41,6466.14 4734.41,6497.71 4725.62,6506.5 4660.59,6506.5 4641.89,6487.8 v1(3874.17,6487.8) 3861.38,6500.59 3861.38,7697.44 4198.07,8034.13 7576.42,8034.13 7852.72,7757.83 7852.72,5369.13 8243.26,4978.59 8345.62,4978.59 J6.1@8353.7,4970.51 8353.7,4908.31 ; C13.2.1@4736.46,1700.87 4736.46,1668.39 4720.71,1652.64 4452.01,1652.64 4421.5,1622.13 4421.5,1286.5 4421.5,741.97 4679.84,483.62 7791.93,483.62 8412.8,1104.49 8412.8,1156.65 8413.05,1156.9 8413.05,1179.55 8412.8,1179.81 8412.8,2007.6 TP2.2.1@8473.19,2067.99 8473.19,2145.69 8452.42,2166.46 8452.42,4843 8405.62,4889.8 8362.49,4889.8 8353.7,4898.59 8353.7,4908.31 ; +5V.1@7870.08,5188.31 7941.08,5188.31 8214.08,4915.31 8346.7,4915.31 8353.7,4908.31 ; R8.2@8119.08,4784.87 8123.85,4789.64 8258.38,4789.64 C2.1@8263.15,4794.41
  Top Layer w20: C13.1.1@4734.41,6466.14 4808.98,6466.14 ; C13.2.1@4736.46,1700.87 4797.48,1700.87 4809.29,1689.06
  Bottom Layer w10: v1(3874.17,6487.8) 3874.17,6446.46 v1(3896.81,6423.82)
CS1: CS1.1 J4.32 U3.1.22 | length 10343.1
  Top Layer w7: v1(4049.88,6516.02) 3952.91,6612.99 3952.91,7637.4 4255.16,7939.65 7523.73,7939.65 7778.5,7684.87 7778.5,5290.6 7759.21,5271.31 7759.21,4671.77 7983.08,4447.91 7983.08,4261.41 8030.87,4213.62 8109.61,4213.62 8129.29,4193.94 8129.29,4011.46 J4.32@8080.47,3962.64 8076.79,3958.96 7738.61,3958.96 CS1.1@7720.48,3977.08 ; v1(4099.88,6460.45) 4197.54,6362.8 U3.1.22@4789.53,6362.8
  Bottom Layer w7: v1(4049.88,6516.02) 4049.88,6513.24 4099.88,6463.24 v1(4099.88,6460.45)
CS2: CS2.1 J4.36 U5.1.22 | length 3314.9
  Top Layer w7: U5.1.22@6929.83,6375.65 7430.98,6375.65 7558.97,6247.67 7558.97,4199.14 7652.97,4105.14 7978.91,4105.14 8036.41,4162.64 J4.36@8080.47,4162.64